# EAGLE board PCB v7 (EAGLE 9.7.0)
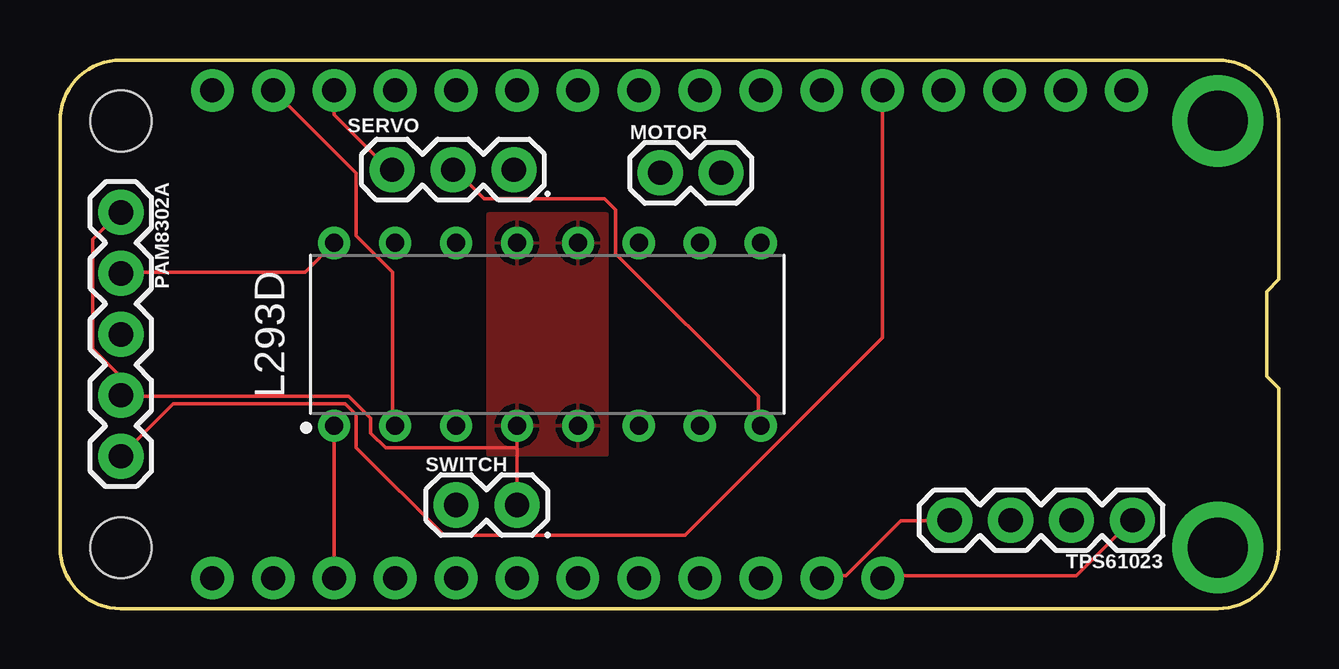
[diagram p0: board, top side]
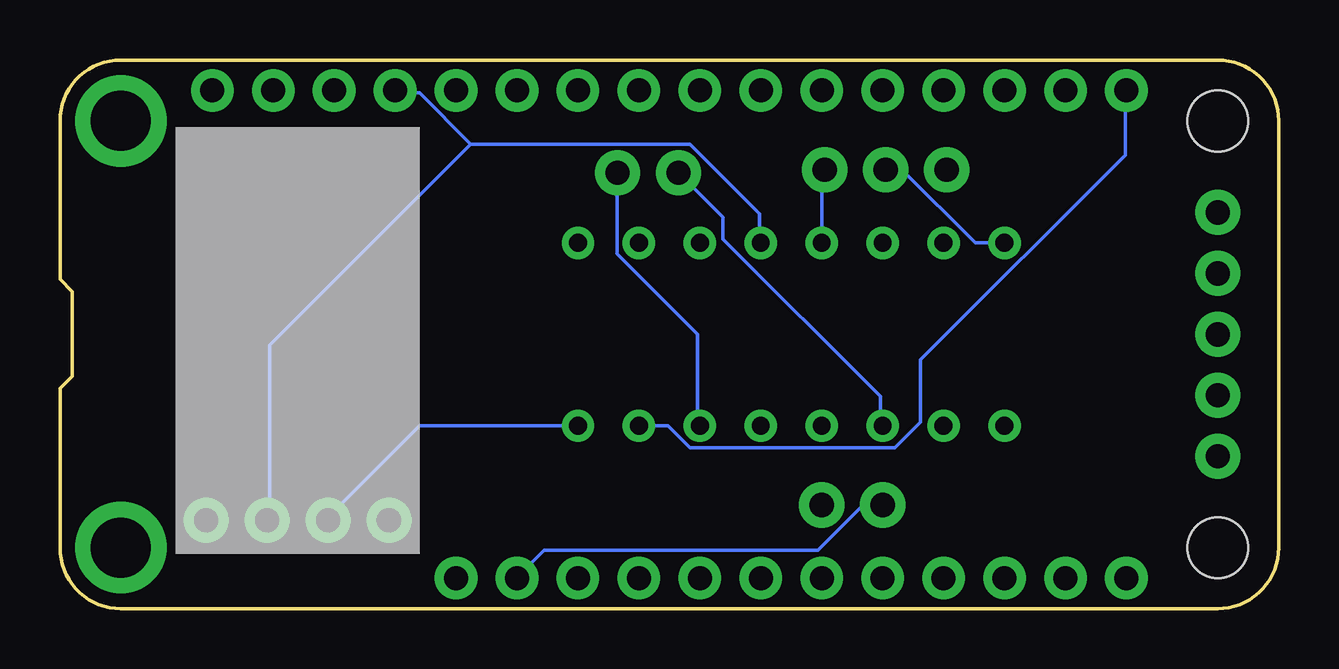
[diagram p1: board, bottom side, seen from below]

Size 50.8 x 22.86 mm. Coordinates in mm from the lower left corner, seen from the top.
Outline: 0,2.54 0,20.32 arc-90 2.54,22.86 48.26,22.86 arc-90 50.8,20.32 50.8,13.72 50.29,13.21 50.29,9.68 50.8,9.18 50.8,2.54 arc-90 48.26,0 2.54,0 arc-90 0,2.54
Copper layers (1*16): Top / Bottom
Stack-up Default Layer Stack: Top User Defined 0.035mm / Dielectric-1 User Defined 1.5mm / Bottom User Defined 0.035mm
Design rules: minimum copper width 6mil, minimum drill size 0.35mm, copper clearance wire_polygon to wire_polygon 6mil, copper clearance wire_polygon to pad_smd 6mil, copper clearance wire_polygon to via 6mil, copper clearance pad_smd to pad_smd 6mil, copper clearance pad_smd to via 6mil, copper clearance via to via 6mil, copper clearance smd to pad (same net) 6mil, copper clearance smd to via (same net) 6mil, copper clearance smd to smd (same net) 6mil, dimension clearance 40mil, restrict clearance 0mil, drill distance 6mil, keepout clearance 0mil

## Footprints (pad centres in the part's own frame; a part is rotated, then mirrored left to right if it is on the bottom)
DIP762W53P254L1969H508Q16B = drill 0.743 pad 1.343: 1 -3.81,8.89; 2 -3.81,6.35; 3 -3.81,3.81; 4 -3.81,1.27; 5 -3.81,-1.27; 6 -3.81,-3.81; 7 -3.81,-6.35; 8 -3.81,-8.89; 9 3.81,-8.89; 10 3.81,-6.35; 11 3.81,-3.81; 12 3.81,-1.27; 13 3.81,1.27; 14 3.81,3.81; 15 3.81,6.35; 16 3.81,8.89
1X02 = drill 1.016 pad 1.88: 1 0,0; 2 2.54,0
FEATHERWING_DIM = drill 1 pad 1.778: 1 6.35,1.27; 2 8.89,1.27; 3 11.43,1.27; 4 13.97,1.27; 5 16.51,1.27; 6 19.05,1.27; 7 21.59,1.27; 8 24.13,1.27; 9 26.67,1.27; 10 29.21,1.27; 11 31.75,1.27; 12 34.29,1.27; 13 36.83,1.27; 14 39.37,1.27; 15 41.91,1.27; 16 44.45,1.27; 17 44.45,21.59; 18 41.91,21.59; 19 39.37,21.59; 20 36.83,21.59; 21 34.29,21.59; 22 31.75,21.59; 23 29.21,21.59; 24 26.67,21.59; 25 24.13,21.59; 26 21.59,21.59; 27 19.05,21.59; 28 16.51,21.59 | drill 2.5 pad 3.81: P$1 2.54,20.32; P$2 2.54,2.54 | hole 2.54: 48.26,20.32; 48.26,2.54
1X05 = drill 1.016 pad 1.88: 1 0,0; 2 2.54,0; 3 5.08,0; 4 7.62,0; 5 10.16,0
1X03 = drill 1.016 pad 1.88: 1 0,0; 2 2.54,0; 3 5.08,0
1X04 = drill 1.016 pad 1.88: 1 0,0; 2 2.54,0; 3 5.08,0; 4 7.62,0

## Placement (x,y rotation side)
L293D  L293  [DIP762W53P254L1969H508Q16B]  20.32,11.43 90 top
MOTOR  [1X02]  25.02,18.16 0 top
MS1  FEATHERWING_NODIM  [FEATHERWING_DIM]  50.8,22.86 180 top
PAM8302A  [1X05]  2.54,16.51 270 top
SERVO  [1X03]  18.92,18.29 180 top
SWITCH  [1X02]  16.51,4.32 0 top
TPS61023  [1X04]  44.7,3.68 180 top

## Library data of the parts
L293D = IC_Power-Management; CATEGORY: IC_Linear; DESCRIPTION: Bipolar Motor Driver; MANUFACTURER: Generic; MPN: Generic; SERIES: L293; SUB-CATEGORY: Motor Driver; TYPE: Bipolar
MOTOR PAM8302A SERVO SWITCH = SparkFun-Connectors
MS1 = adafruit
TPS61023 = SparkFun-Connectors; PROD_ID: CONN-09696

## Nets
+5: L293D.8 L293D.16 PAM8302A.2 SERVO.2 TPS61023.3
A0: MS1.5 PAM8302A.5
CTL: MS1.14 SERVO.3
EN: MS1.27 SWITCH.1 TPS61023.4
F14: L293D.1 MS1.19
F17: L293D.2 MS1.15
F21: L293D.7 MS1.16
GND: L293D.4 L293D.5 L293D.12 L293D.13 MS1.4 PAM8302A.1 PAM8302A.4 SERVO.1 SWITCH.2 TPS61023.2
M+: L293D.3 MOTOR.1
M-: L293D.6 MOTOR.2
VBAT: MS1.28 TPS61023.1

## Tracks (layer width: path | path; a pad name or v marks a point on that pad's centre or on a via)
+5
  Top 0.152: L293D.16 10.21,14.02 2.59,14.02 PAM8302A.2 | L293D.8 29.11,7.62 29.11,8.84 23.16,14.78 23.16,16.61 22.71,17.07 17.68,17.07 16.46,18.29 SERVO.2
  Bottom 0.152: L293D.8 35.81,7.62 39.62,3.81 TPS61023.3 | L293D.16 12.65,15.24 15.7,18.29 SERVO.2
A0
  Top 0.152: MS1.5 34.29,11.28 26.06,3.05 16,3.05 12.34,6.71 12.34,8.08 11.89,8.53 4.72,8.53 PAM8302A.5
CTL
  Top 0.152: MS1.14 11.43,20.57 13.72,18.29 SERVO.3
EN
  Top 0.152: MS1.27 31.85,1.37 32.77,1.37 35.05,3.66 37.03,3.66 TPS61023.4
  Bottom 0.152: SWITCH.1 16.61,4.27 17.37,4.27 19.2,2.44 30.63,2.44 31.7,1.37 MS1.27
F14
  Top 0.152: MS1.19 L293D.1
F17
  Top 0.152: MS1.15 12.34,18.14 12.34,15.54 13.87,14.02 13.87,7.62 L293D.2
F21
  Bottom 0.152: L293D.7 25.45,7.62 24.54,6.71 16,6.71 14.94,7.77 14.94,10.36 6.4,18.9 6.4,21.49 MS1.16
GND
  Top 0.152: PAM8302A.1 2.44,16.46 1.37,15.39 1.37,10.82 2.44,9.75 2.44,8.99 PAM8302A.4 2.59,8.84 12.04,8.84 12.95,7.92 12.95,7.32 13.56,6.71 19.05,6.71 | L293D.4 19.05,6.71 | 19.05,6.71 SWITCH.2
  Bottom 0.152: 33.68,19.36 35.81,21.49 36.73,21.49 MS1.4 | 33.68,19.36 24.54,19.36 21.64,16.46 21.64,15.24 L293D.12 | 33.68,19.36 42.06,10.97 42.06,3.81 TPS61023.2 | L293D.13 19.05,18.29 SERVO.1
  pour Top: 17.78,16.51 17.78,6.35 22.86,6.35 22.86,16.51
M+
  Bottom 0.152: MOTOR.1 23.16,16.31 23.16,15.39 16.61,8.84 16.61,7.62 L293D.3
M-
  Bottom 0.152: L293D.6 24.23,7.62 24.23,11.43 27.58,14.78 27.58,18.14 MOTOR.2
VBAT
  Top 0.152: MS1.28 34.29,1.37 42.37,1.37 44.65,3.66 TPS61023.1